# EAGLE board FinalSchV3 (EAGLE 7.5.0)
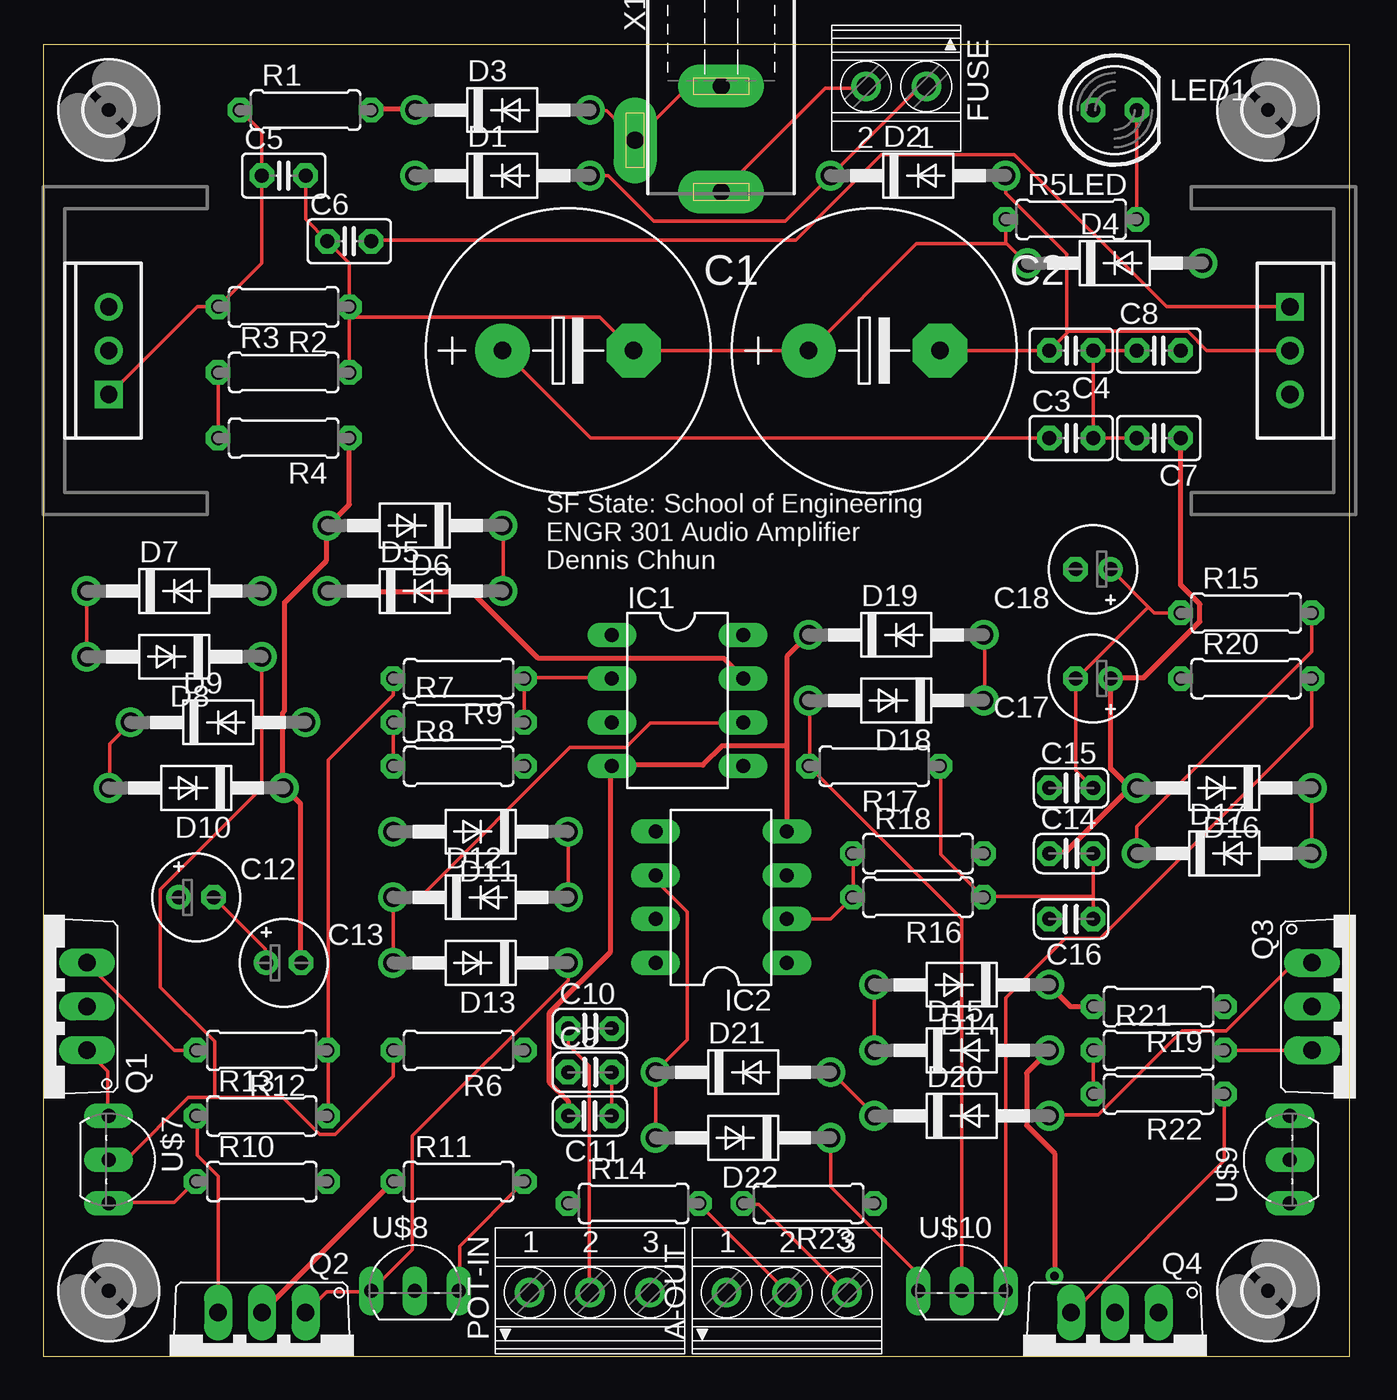
[diagram p0: board, top side]
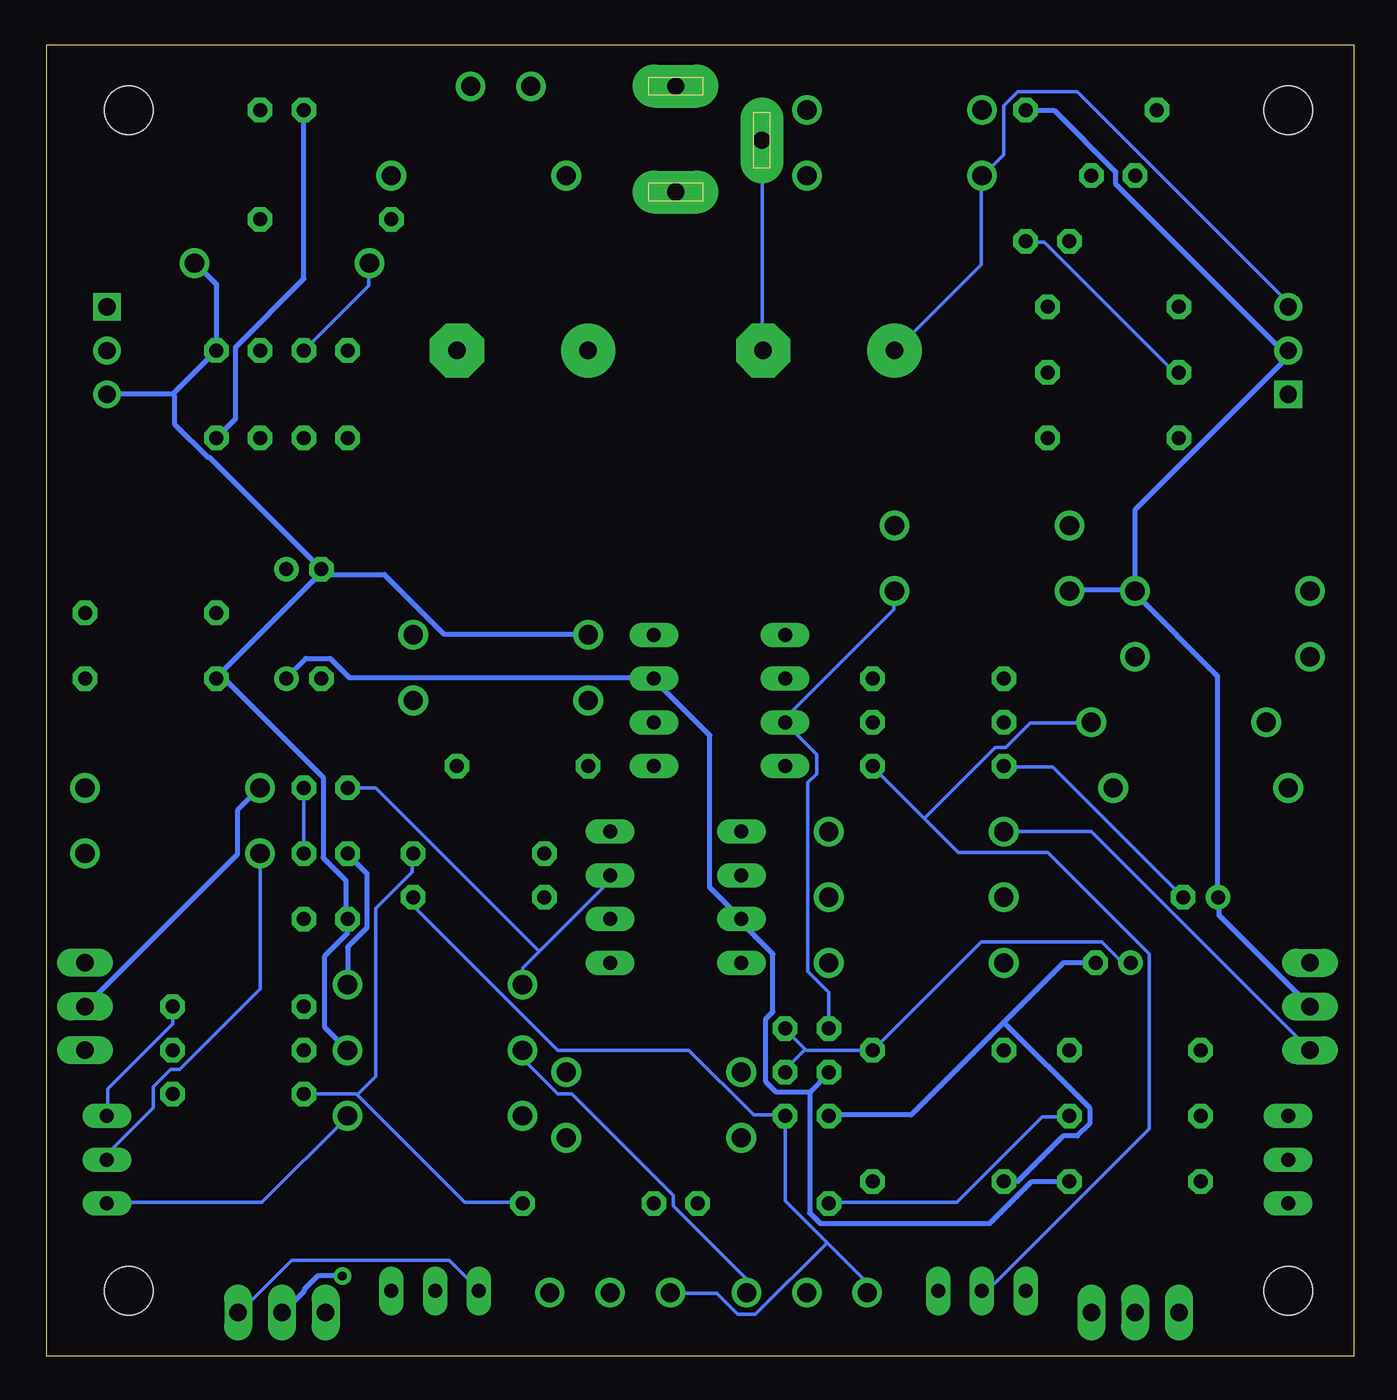
[diagram p1: board, bottom side, seen from below]

Size 75.87 x 76.19 mm. Coordinates in mm from the lower left corner, seen from the top.
Outline: 0,0 75.87,0 75.87,76.19 0,76.19 0,0
Copper layers (1*16): Top 0.035mm / dielectric 1.5mm / Bottom 0.035mm
Design rules "engr301-drc": minimum track width 8mil, minimum drill 20mil, track to track 8mil, track to pad 10mil, pad to pad 10mil, via to via 10mil, smd to smd 8mil, copper to edge 15mil, drill to drill 8mil, minimum pad ring 12mil, minimum via ring 10mil, stop-mask expansion 4mil, vias tented up to drill 25mil, thermal gap 10mil
Net classes: 1 Plus: width 0.305 mm, clearance 0.203 mm; 2 Minus: width 0.305 mm, clearance 0.203 mm

## Footprints (pad centres in the part's own frame; a part is rotated, then mirrored left to right if it is on the bottom)
1751251 = drill 1.1 pad 1.7: 1 -3.5,-0.1; 2 0,-0.1; 3 3.5,-0.1
E7,5-16 = drill 1.016 pad 3.15: + -3.81,0 | drill 1.016 pad 3.15 octagon: - 3.81,0
C025-025X050 = drill 0.813 octagon: 1 -1.27,0; 2 1.27,0
C025-024X044 = drill 0.813 octagon: 1 -1.27,0; 2 1.27,0
E2-5 = drill 0.813 pad 1.27: + -1.016,0 | drill 0.813 pad 1.27 octagon: - 1.016,0
DO41-10 = drill 1.118: A 5.08,0; C -5.08,0
1751248 = drill 1.1 pad 1.7: 1 -1.75,-0.1; 2 1.75,-0.1
DIL08 = drill 0.813 long: 1 -3.81,-3.81; 2 -1.27,-3.81; 3 1.27,-3.81; 4 3.81,-3.81; 5 3.81,3.81; 6 1.27,3.81; 7 -1.27,3.81; 8 -3.81,3.81
LED5MM = drill 0.813 octagon: A -1.27,0; K 1.27,0
TO220V = drill 1.016 long: 1 -2.54,-2.54; 2 0,-2.54; 3 2.54,-2.54
0207/7 = drill 0.813 octagon: 1 -3.81,0; 2 3.81,0
TO220-ADJ = drill 1 square: ADJ -2.54,0 | drill 1: IN 2.54,0; OUT 0,0
TO220-ADJ-NEG = drill 1 square: ADJ -2.54,0 | drill 1: IN 0,0; OUT 2.54,0
2,8 = hole 2.8: 0,0
2N5401 = drill 0.813 long: B 0,0; C -2.54,0; E 2.54,0
2N5551 = drill 0.813 long: B 0,0; C -2.54,0; E 2.54,0
733980-62 = drill 1 pad 2.5 long: 1 0,8.57; 2 0,2.42; 3 5,5.57

## Placement (x,y rotation side)
A-OUT  1751251  [1751251]  43.18,3.81 0 top
C1  1m  [E7,5-16]  30.48,58.42 0 top
C2  1m  [E7,5-16]  48.26,58.42 0 top
C3  10u  [C025-025X050]  59.69,53.34 0 top
C4  10u  [C025-025X050]  59.69,58.42 180 top
C5  10u  [C025-025X050]  13.97,68.58 0 top
C6  10u  [C025-025X050]  17.78,64.77 0 top
C7  10u  [C025-025X050]  64.77,53.34 180 top
C8  10u  [C025-025X050]  64.77,58.42 0 top
C9  .1u  [C025-024X044]  31.75,16.51 0 top
C10  680p  [C025-024X044]  31.75,19.05 0 top
C11  .1u  [C025-024X044]  31.75,13.97 180 top
C12  10u  [E2-5]  8.89,26.67 0 top
C13  10u  [E2-5]  13.97,22.86 0 top
C14  .1u  [C025-024X044]  59.69,29.21 0 top
C15  680p  [C025-024X044]  59.69,33.02 0 top
C16  .1u  [C025-024X044]  59.69,25.4 180 top
C17  10u  [E2-5]  60.96,39.37 180 top
C18  10u  [E2-5]  60.96,45.72 180 top
D1  1N4004  [DO41-10]  26.67,68.58 0 top
D2  1N4004  [DO41-10]  50.8,68.58 0 top
D3  1N4004  [DO41-10]  26.67,72.39 0 top
D4  1N4004  [DO41-10]  62.23,63.5 0 top
D5  1N4004  [DO41-10]  21.59,44.45 0 top
D6  1N4004  [DO41-10]  21.59,48.26 180 top
D7  1N4004  [DO41-10]  7.62,44.45 0 top
D8  1N4004  [DO41-10]  7.62,40.64 180 top
D9  1N4004  [DO41-10]  10.16,36.83 0 top
D10  1N4004  [DO41-10]  8.89,33.02 180 top
D11  1N4004  [DO41-10]  25.4,30.48 180 top
D12  1N4004  [DO41-10]  25.4,26.67 0 top
D13  1N4004  [DO41-10]  25.4,22.86 180 top
D14  1N4004  [DO41-10]  53.34,21.59 180 top
D15  1N4004  [DO41-10]  53.34,17.78 0 top
D16  1N4004  [DO41-10]  68.58,33.02 180 top
D17  1N4004  [DO41-10]  68.58,29.21 0 top
D18  1N4004  [DO41-10]  49.53,38.1 180 top
D19  1N4004  [DO41-10]  49.53,41.91 0 top
D20  1N4004  [DO41-10]  53.34,13.97 0 top
D21  1N4004  [DO41-10]  40.64,16.51 0 top
D22  1N4004  [DO41-10]  40.64,12.7 180 top
FUSE  1751248  [1751248]  49.53,73.66 180 top
IC1  AD797N  [DIL08]  36.83,38.1 270 top
IC2  AD797N  [DIL08]  39.37,26.67 90 top
LED1  [LED5MM]  62.23,72.39 0 top
POT-IN  1751251  [1751251]  31.75,3.81 0 top
Q1  MJE15032  [TO220V]  0,20.32 90 top
Q2  MJE15033  [TO220V]  12.7,0 180 top
Q3  MJE15032  [TO220V]  76.2,20.32 270 top
Q4  MJE15033  [TO220V]  62.23,0 180 top
R1  100  [0207/7]  15.24,72.39 0 top
R2  1.1k  [0207/7]  13.97,60.96 180 top
R3  1.1k  [0207/7]  13.97,57.15 0 top
R4  100  [0207/7]  13.97,53.34 180 top
R5LED  1k  [0207/7]  59.69,66.04 0 top
R6  1k  [0207/7]  24.13,17.78 180 top
R7  1k  [0207/7]  24.13,36.83 0 top
R8  1k  [0207/7]  24.13,34.29 0 top
R9  3.3k  [0207/7]  24.13,39.37 180 top
R10  56  [0207/7]  12.7,10.16 0 top
R11  56  [0207/7]  24.13,10.16 0 top
R12  10  [0207/7]  12.7,17.78 180 top
R13  10  [0207/7]  12.7,13.97 0 top
R14  56  [0207/7]  34.29,8.89 0 top
R15  1k  [0207/7]  69.85,43.18 0 top
R16  1k  [0207/7]  50.8,26.67 180 top
R17  1k  [0207/7]  48.26,34.29 180 top
R18  3.3k  [0207/7]  50.8,29.21 0 top
R19  56  [0207/7]  64.77,20.32 180 top
R20  56  [0207/7]  69.85,39.37 0 top
R21  10  [0207/7]  64.77,17.78 0 top
R22  10  [0207/7]  64.77,15.24 180 top
R23  56  [0207/7]  44.45,8.89 180 top
U$1  V_REG_317SINK  [TO220-ADJ]  3.81,58.42 90 top
U$2  V_REG_337  [TO220-ADJ-NEG]  72.39,58.42 270 top
U$3  [2,8]  71.12,72.39 0 top
U$4  [2,8]  3.81,72.39 0 top
U$5  [2,8]  3.81,3.81 0 top
U$6  [2,8]  71.12,3.81 0 top
U$7  2N5401  [2N5401]  3.81,11.43 270 top
U$8  2N5551  [2N5551]  21.59,3.81 0 top
U$9  2N5401  [2N5401]  72.39,11.43 90 top
U$10  2N5551  [2N5551]  53.34,3.81 0 top
X1  [733980-62]  39.37,76.2 180 top

## Library data of the parts
A-OUT FUSE POT-IN = con-phoenix-350; OC_FARNELL: unknown; OC_NEWARK: unknown
C1-C18 R1-R4 R5LED R6-R23 = rcl
D1-D22 = diode
IC1 IC2 = analog-devices; MF: ALTERA CORPORATION; MPN: AD797ANZ; OC_FARNELL: 9603778; OC_NEWARK: 59K6088
LED1 = led
Q1-Q4 U$1 U$2 U$7-U$10 = engr301-proj 
U$3-U$6 = holes
X1 = con-conrad

## Nets
GND [GND]: A-OUT.1 C9.2 C10.2 C11.1 C12.- C13.+ C14.2 C15.2 C16.1 C17.- C18.+ POT-IN.1 R6.1 R7.1 R8.1 R15.1 R16.1 R17.1
GPWR [GPWR]: C1.- C2.+ C3.2 C4.1 C5.2 C6.1 C7.2 C8.1 D3.A D4.C R2.1 R3.2 R5LED.1 X1.2 X1.3
N$1: C1.+ C3.1 D1.C U$1.IN
N$2: D1.A D2.C FUSE.1
N$3: C2.- C4.2 D2.A U$2.IN
N$4: D7.C D8.A
N$5: A-OUT.2 R14.2
N$6: D8.C R6.2 U$7.B
N$7: A-OUT.3 R23.2
N$8: FUSE.2 X1.1
N$10: C6.2 R3.1 R4.2 U$2.ADJ
N$11: D11.A Q1.1 U$7.C
N$12: C5.1 R1.1 R2.2 U$1.ADJ
N$13: D16.C D17.A
N$14: D11.C D12.A
N$15: D12.C D13.A IC1.6
N$16: LED1.K R5LED.2
N$17: C10.1 D5.A D6.C IC1.3 POT-IN.2
N$18: D13.C Q2.1 U$8.C
N$19: R11.2 U$8.E
N$20: IC1.2 R7.2 R9.1
N$21: D17.C R15.2 U$9.B
N$22: D20.A Q3.1 U$9.C
N$23: D9.A R8.2 U$8.B
N$24: D9.C D10.A
N$25: D20.C D21.A
N$26: Q1.3 R12.2
N$27: R9.2 R12.1 R13.2 R14.1
N$28: Q2.3 R13.1
N$29: D21.C D22.A IC2.6
N$30: D22.C Q4.1 U$10.C
N$31: R20.2 U$10.E
N$32: IC2.2 R16.2 R18.1
N$33: D18.A R17.2 U$10.B
N$34: D18.C D19.A
N$35: C15.1 D14.A D15.C IC2.3 POT-IN.3
N$36: Q3.3 R21.2
N$37: R18.2 R21.1 R22.2 R23.1
N$38: Q4.3 R22.1
N$39 [Minus]: C8.2 C11.2 C13.- C16.2 C18.- D4.A D6.A D10.C D15.A D19.C IC1.4 IC2.4 Q2.2 Q4.2 R4.1 R11.1 R20.1 U$2.OUT
Q1: R10.1 U$7.E
Q3 [Plus]: C7.1 C9.1 C12.+ C14.1 C17.+ D3.C D5.C D7.A D14.C D16.A IC1.7 IC2.7 LED1.A Q1.2 Q3.2 R1.2 R10.2 R19.2 U$1.OUT
Q4: R19.1 U$9.E

## Tracks (layer width: path | path; a pad name or v marks a point on that pad's centre or on a via)
GND
  Top 0.203: R15.1 64.52,43.18 64.16,43.54 | C18.+ 64.16,43.54 | C14.2 60.96,26.72 | 60.96,26.72 C16.1 | 60.96,26.72 54.66,26.72 R16.1 52.12,29.16 52.12,34.24 R17.1 | 59.94,39.32 59.94,34.04 C15.2 | 59.94,39.32 64.16,43.54 | 59.94,39.32 C17.- | R7.1 R8.1 | C12.- 12.9,23.67 12.9,22.86 C13.+ | C9.2 C11.1
  Bottom 0.203: C14.2 C15.2 | C12.- 17.48,34.24 20.32,34.24 R8.1 | 31.85,17.83 33.02,19 C10.2 | 31.85,17.83 31.8,17.78 R6.1 21.64,24.08 14.63,24.08 13.41,22.86 C13.+ | 30.58,6.6 33.02,9.04 C11.1 33.02,14.02 34.85,14.02 38.61,17.78 46.23,17.78 54.56,26.11 54.56,26.62 R16.1 | 30.58,6.6 28.35,4.37 28.35,3.76 POT-IN.1 | 30.58,6.6 34.75,2.44 35.76,2.44 36.98,3.66 39.62,3.66 A-OUT.1 | 31.85,17.83 33.02,16.66 C9.2
GPWR
  Top 0.203: R5LED.1 55.88,64.72 55.93,64.67 | 55.93,64.67 57.1,63.5 D4.C | C7.2 C3.2 C4.1 C8.1 | D3.A 31.8,72.34 32.72,72.34 34.34,70.71 X1.3 34.44,70.71 37.49,73.76 39.32,73.76 X1.2 | 17.78,60.35 R3.2 | C5.2 15.24,66.04 C6.1 17.78,63.5 R2.1 17.78,60.35 | 17.78,60.35 32.31,60.35 34.24,58.42 C1.- C2.+ 44.5,58.42 50.7,64.62 55.88,64.62 55.93,64.67
  Bottom 0.203: C4.1 57.2,62.18 57.2,63.5 D4.C | X1.3 34.34,70.61 34.34,58.42 C1.-
N$1
  Top 0.203: C3.1 31.8,53.34 26.72,58.42 C1.+
  Bottom 0.203: U$1.IN 3.86,60.96 3.86,61.27 16.05,73.46 19.51,73.46 20.32,72.64 20.32,69.8 21.54,68.58 D1.C 21.64,68.58 21.64,63.4 26.62,58.42 C1.+
N$2
  Top 0.203: FUSE.1 51.21,73.66 50.8,73.66 D2.C 43.08,65.94 35.46,65.94 32.82,68.58 D1.A
N$3
  Top 0.203: C2.- C4.2 59.49,59.49 | U$2.IN 67.56,58.42 66.45,59.54 59.54,59.54 59.49,59.49 | D2.A 55.88,67.56 59.44,64.01 59.44,59.54 59.49,59.49
N$4
  Top 0.203: D7.C D8.A
N$5
  Top 0.203: R14.2 38.1,8.84 43.18,3.76 A-OUT.2
N$6
  Top 0.203: 9.96,15.04 13.92,15.04 16.05,12.9 16.97,12.9 20.32,16.26 R6.2 | 9.96,15.04 8.43,15.04 4.88,11.48 3.86,11.48 U$7.B | D8.C 12.7,33.02 6.81,27.13 6.81,21.44 9.96,18.29 9.96,15.04
N$7
  Top 0.203: R23.2 40.64,8.84 41.55,8.84 46.63,3.76 A-OUT.3
N$8
  Top 0.203: FUSE.2 47.75,73.66 45.41,73.66 39.42,67.67 X1.1
N$10
  Top 0.203: R3.1 R4.2 | U$2.ADJ 65.23,60.96 56.39,69.8 48.67,69.8 43.69,64.82 19.1,64.82 C6.2
  Bottom 0.203: C6.2 19,64.72 17.98,64.72 10.46,57.2 10.16,57.2 R3.1
N$11
  Top 0.203: Q1.1 3.76,16.56 3.76,14.02 U$7.C
  Bottom 0.203: D11.A 15.24,30.48 Q1.1
N$12
  Top 0.203: R1.1 12.7,71.12 C5.1 12.7,63.5 R2.2 8.94,60.96 3.86,55.88 U$1.ADJ
N$13
  Top 0.203: D16.C D17.A
N$14
  Top 0.203: D11.C D12.A
N$15
  Top 0.203: IC1.6 40.64,36.78 35.26,36.78 33.83,35.36 30.58,35.36 21.95,26.72 20.32,26.72 D12.C D13.A
N$16
  Top 0.203: LED1.K R5LED.2
N$17
  Top 0.203: C10.1 30.48,18.09 31.7,16.87 31.7,3.76 POT-IN.2 | D6.C 26.72,48.26 26.72,44.5 D5.A
  Bottom 0.203: D5.A 26.72,44.4 26.72,43.38 33.02,37.08 IC1.3 33.02,36.78 31.19,34.95 31.19,33.83 31.7,33.33 31.7,22.35 30.48,21.13 C10.1
N$18
  Top 0.203: Q2.1 16.46,3.76 19,3.76 U$8.C 21.44,6.2 21.44,12.8 30.48,21.84 D13.C
N$19
  Top 0.203: R11.2 24.18,6.4 24.18,3.86 U$8.E
N$20
  Top 0.203: R7.2 R9.1 27.94,39.42 33.02,39.42 IC1.2
N$21
  Top 0.203: R15.2 73.66,40.95 63.5,30.79 D17.C
  Bottom 0.203: D17.C 63.5,21.34 68.17,16.66 68.68,16.66 69.7,15.65 69.7,14.43 72.34,11.79 72.34,11.48 U$9.B
N$22
  Top 0.203: Q3.1 72.64,22.86 68.68,18.9 66.14,18.9 61.27,14.02 58.42,14.02 D20.A
  Bottom 0.203: U$9.C 72.34,8.94 63.4,8.94 58.42,13.92 D20.A
N$23
  Bottom 0.203: 24.94,31.24 27.94,34.24 R8.2 | 24.94,31.24 22.96,29.26 17.78,29.26 11.89,23.37 11.89,13.21 21.23,3.86 21.54,3.86 U$8.B | 24.94,31.24 20.83,35.36 20.22,35.36 18.8,36.78 15.24,36.78 D9.A
N$24
  Top 0.203: D10.A 3.86,33.02 3.86,35.56 5.08,36.78 D9.C
N$25
  Top 0.203: D20.C 48.26,14.02 45.72,16.56 D21.A
N$26
  Top 0.203: R12.2 7.62,17.78 Q1.3
N$27
  Top 0.203: 16.56,17.78 16.56,14.02 R13.2 | R9.2 20.32,38.41 16.56,34.65 16.56,17.78 | 16.56,17.78 R12.1
  Bottom 0.203: R14.1 30.48,8.94 23.06,8.94 18.09,13.92 16.56,13.92 R13.2
N$28
  Top 0.203: Q2.3 10.16,10.46 8.94,11.68 8.94,13.92 R13.1
N$29
  Top 0.203: IC2.6 35.56,27.64 37.39,25.81 37.39,18.39 35.56,16.56 D21.C D22.A
N$30
  Top 0.203: U$10.C 50.8,4.78 45.72,9.86 D22.C
  Bottom 0.203: Q4.1 64.72,2.54 61.67,5.59 52.53,5.59 50.8,3.86 U$10.C
N$31
  Top 0.203: U$10.E 55.88,20.83 59.33,24.28 61.37,24.28 73.66,36.58 R20.2
N$32
  Top 0.203: IC2.2 45.72,25.4 R16.2 47.04,26.72 47.04,29.16 R18.1
N$33
  Top 0.203: D18.A 44.5,38.1 44.5,34.34 R17.2 53.34,25.4 U$10.B
N$34
  Top 0.203: D18.C 54.66,38.1 54.66,41.86 D19.A
N$35
  Top 0.203: D15.C D14.A
  Bottom 0.203: IC2.3 43.18,27.64 47.3,23.52 | 47.3,23.52 48.26,22.55 D14.A | C15.1 56.79,33.02 47.3,23.52 | D15.C 48.26,17.27 46.23,15.24 45.41,15.24 39.52,9.35 39.52,8.74 35.26,4.47 35.26,3.76 POT-IN.3
N$36
  Top 0.203: Q3.3 R21.2
N$37
  Top 0.203: R22.2 R21.1
  Bottom 0.203: 57.86,15.19 57.91,15.24 R22.2 | 57.86,15.19 51.61,8.94 48.26,8.94 R23.1 | 57.86,15.19 56.79,16.26 56.79,26.01 54.66,28.14 54.66,29.16 R18.2
N$38
  Top 0.203: R22.1 68.58,11.38 59.74,2.54 Q4.3
N$39  (via drill 0.51)
  Top 0.305: Q2.2 R11.1 | R4.1 17.78,49.48 16.56,48.26 D6.A 16.46,48.16 16.46,46.23 14.02,43.79 14.02,37.49 13.92,37.39 13.92,33.12 D10.C 14.02,33.02 14.94,32.11 14.94,22.86 C13.- | v58.73,4.67 58.73,11.79 57.1,13.41 57.1,16.46 D15.A | 43.18,35.46 43.18,40.64 D19.C | 43.18,35.46 IC2.4 | 43.18,35.46 39.42,35.46 38.3,34.34 33.02,34.34 IC1.4 32.92,34.24 32.92,23.47 29.36,19.91 29.36,15.95 30.48,14.83 C11.2
  Bottom 0.305: 20.32,19.41 16.87,22.86 C13.- | 20.32,19.41 25.7,14.02 30.48,14.02 C11.2 | R11.1 19.51,10.16 16.87,12.8 16.05,12.8 15.34,13.51 15.34,14.43 20.32,19.41 | D15.A 59.74,19.1 59.74,23.27 58.42,24.59 C16.2 58.52,25.5 58.52,27.64 59.84,28.96 59.84,33.63 65.73,39.52 R20.1 66.04,39.42 59.94,45.52 C18.- | v58.73,4.67 60.15,4.67 60.96,3.86 60.96,3.76 62.18,2.54 Q4.2 | D4.A 67.26,63.5 66.04,62.28 C8.2 68.58,55.88 | 68.58,55.88 U$2.OUT | C18.- 66.45,52.22 66.55,52.22 68.48,54.15 68.48,55.78 68.58,55.88 | D19.C 44.5,41.96 52.83,41.96 56.29,45.41 59.84,45.41 C18.-
Q1
  Top 0.203: U$7.E 3.86,8.94 7.62,8.94 8.84,10.16 R10.1
Q3
  Top 0.305: R1.2 19.1,72.44 21.54,72.44 D3.C | R19.2 59.64,20.32 58.42,21.54 D14.C | C14.1 58.42,29.26 59.33,29.26 63.09,33.02 D16.A 62.99,33.12 61.98,34.14 C17.+ 62.08,39.42 63.91,39.42 67.16,42.67 67.16,43.69 66.04,44.81 C7.1 | D5.C 16.56,44.4 24.89,44.4 28.75,40.54 39.52,40.54 40.64,39.42 IC1.7
  Bottom 0.305: Q1.2 7.82,25.6 7.82,26.62 C12.+ 7.92,26.72 7.92,39.52 12.7,44.3 D7.A | D7.A 12.7,49.17 3.86,58.01 3.86,58.42 U$1.OUT 3.96,58.52 4.27,58.52 13.82,68.07 13.82,68.78 17.37,72.34 19,72.34 R1.2 | D5.C 16.46,44.5 12.8,44.5 D7.A | R10.2 18.69,10.16 21.13,7.72 30.99,7.72 31.6,8.33 31.6,15.34 | 31.6,15.34 30.48,16.46 C9.1 | 31.6,15.34 33.53,15.34 34.14,15.95 34.14,19.61 33.73,20.02 33.73,23.37 35.56,25.2 IC2.7 37.39,27.23 37.39,36.07 40.64,39.32 IC1.7 40.74,39.42 58.32,39.42 59.44,40.54 60.86,40.54 61.98,39.42 C17.+ | LED1.A 60.96,62.59 64.92,58.62 64.92,54.46 C7.1 | Q3.2 64.82,29.16 64.82,31.7 D16.A | D14.C 58.42,23.77 57.3,24.89 57.3,28.04 58.42,29.16 C14.1
Q4
  Bottom 0.203: R19.1 68.58,19.3 72.34,15.54 72.34,14.02 U$9.E

## Text on the board
tNames: SF State: School of Engineering / ENGR 301 Audio Amplifier / Dennis Chhun